# EAGLE board plc (EAGLE 8.1.0)
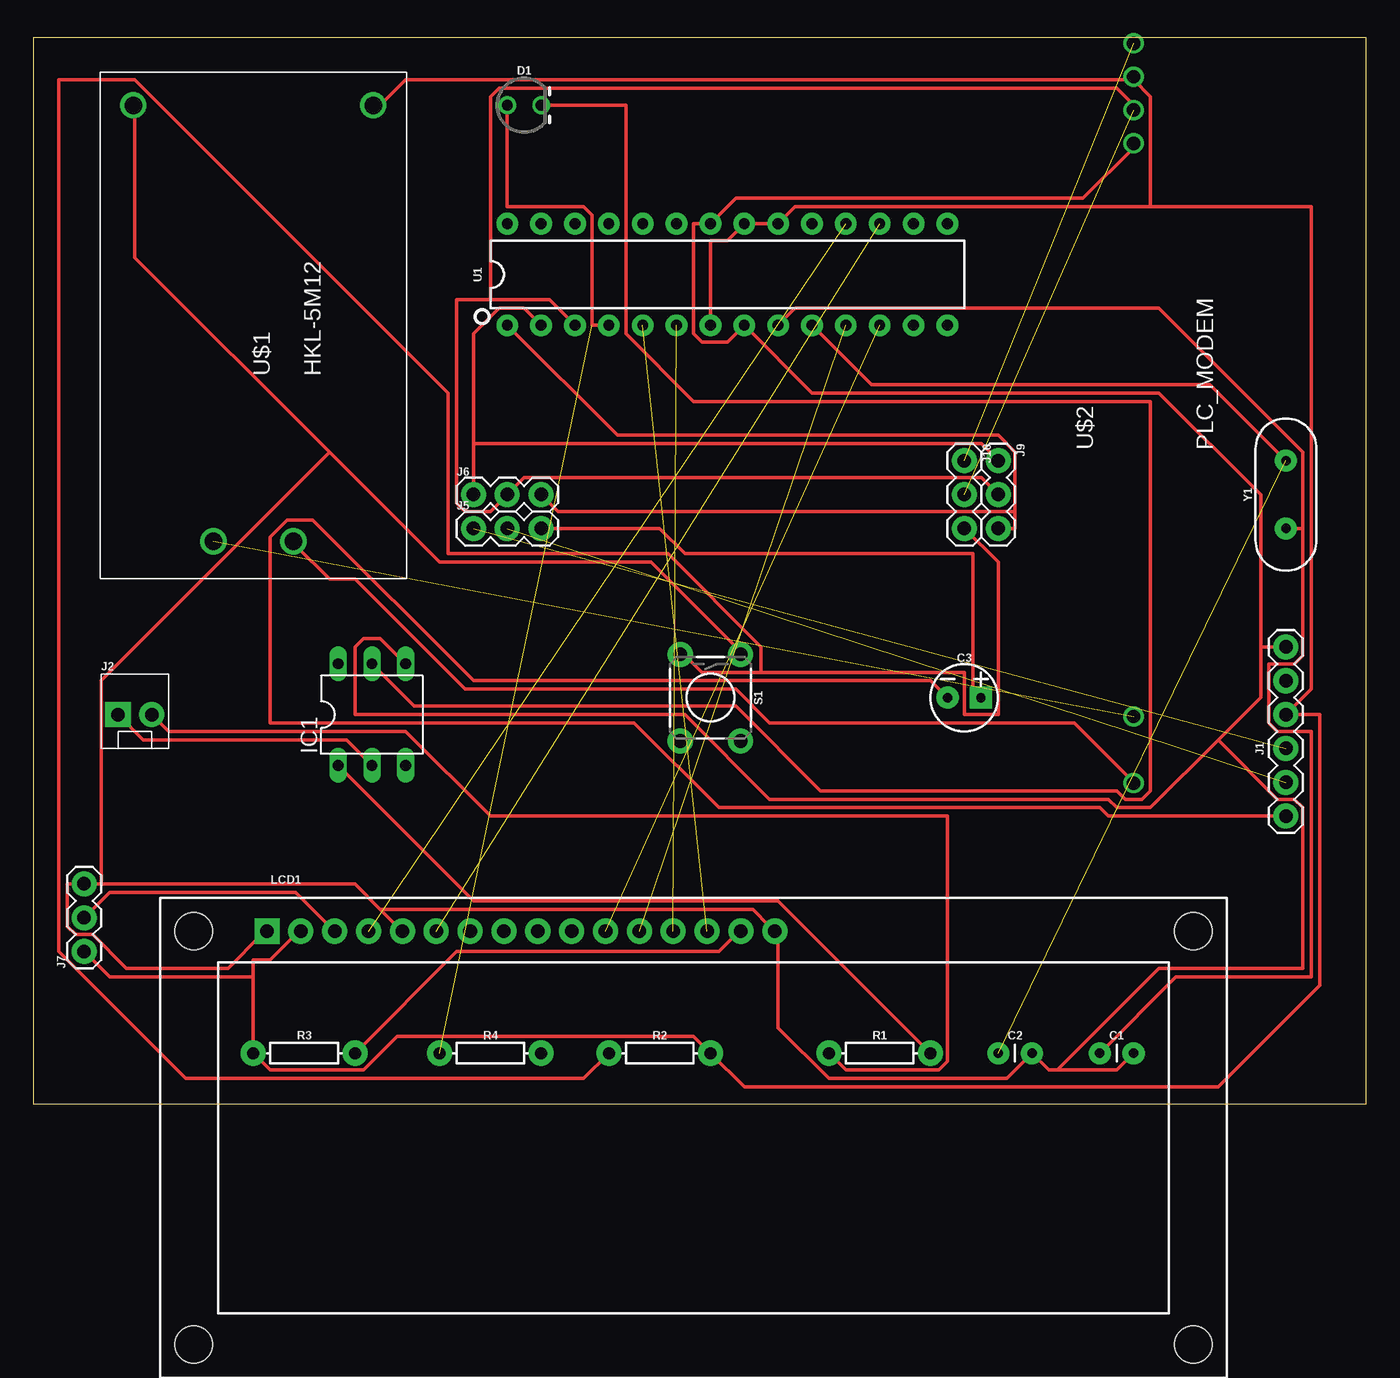
[diagram p0: board, top side]

Size 100 x 80 mm. Coordinates in mm from the lower left corner, seen from the top.
Outline: 0,0 100,0 100,80 0,80 0,0
Copper layers (1*16): Top 0.035mm / dielectric 1.5mm / Bottom 0.035mm
Design rules "default": minimum track width 10mil, minimum drill 24mil, track to track 8mil, track to pad 8mil, pad to pad 8mil, via to via 8mil, smd to smd 8mil, copper to edge 40mil, drill to drill 8mil, minimum pad ring 10mil, minimum via ring 8mil, stop-mask expansion 4mil, vias tented up to drill 0mil, thermal gap 10mil

## Footprints (pad centres in the part's own frame; a part is rotated, then mirrored left to right if it is on the bottom)
CAP-PTH-2.54 = drill 0.7 pad 1.651: 1 -1.27,0; 2 1.27,0
CPOL-RADIAL-2.5MM-5MM = drill 0.7 pad 1.651 square: 1 1.25,0 | drill 0.7 pad 1.651: 2 -1.25,0
LED_3MM-NS = drill 0.813: A -1.27,0; K 1.27,0
DIL06 = drill 0.813 long: 1 -2.54,-3.81; 2 0,-3.81; 3 2.54,-3.81; 4 2.54,3.81; 5 0,3.81; 6 -2.54,3.81
FTDI_BASIC = drill 1.016 pad 1.88: CTS 10.16,0; DTR 0,0; GND 12.7,0; RXI 2.54,0; TXO 5.08,0; VCC 7.62,0
MOLEX-1X2 = drill 1.016 pad 1.88 square: 1 0,0 | drill 1.016 pad 1.88: 2 2.54,0
1X03 = drill 1.016 pad 1.88: 1 0,0; 2 2.54,0; 3 5.08,0
LCD-16X2 = drill 1.016 pad 1.88 square: 1 -32,15.5 | drill 1.016 pad 1.88: 2 -29.46,15.5; 3 -26.92,15.5; 4 -24.38,15.5; 5 -21.84,15.5; 6 -19.3,15.5; 7 -16.76,15.5; 8 -14.22,15.5; 9 -11.68,15.5; 10 -9.14,15.5; 11 -6.6,15.5; 12 -4.06,15.5; 13 -1.52,15.5; 14 1.02,15.5; 15 3.56,15.5; 16 6.1,15.5 | hole 2.8: -37.5,15.5; -37.5,-15.5; 37.5,15.5; 37.5,-15.5
AXIAL-0.3 = drill 0.9 pad 1.88: P$1 -3.81,0; P$2 3.81,0
TACTILE_SWITCH_PTH_6.0MM = drill 1.016 pad 1.88: 1 -3.251,2.261; 2 3.251,2.261; 3 -3.251,-2.261; 4 3.251,-2.261
DIP28 = drill 0.813 pad 1.626: 1 -16.51,-3.81; 2 -13.97,-3.81; 3 -11.43,-3.81; 4 -8.89,-3.81; 5 -6.35,-3.81; 6 -3.81,-3.81; 7 -1.27,-3.81; 8 1.27,-3.81; 9 3.81,-3.81; 10 6.35,-3.81; 11 8.89,-3.81; 12 11.43,-3.81; 13 13.97,-3.81; 14 16.51,-3.81; 15 16.51,3.81; 16 13.97,3.81; 17 11.43,3.81; 18 8.89,3.81; 19 6.35,3.81; 20 3.81,3.81; 21 1.27,3.81; 22 -1.27,3.81; 23 -3.81,3.81; 24 -6.35,3.81; 25 -8.89,3.81; 26 -11.43,3.81; 27 -13.97,3.81; 28 -16.51,3.81
HLK-5M12 = drill 1.3 pad 2: 1 -16.2,3; 2 -16.2,-3 | drill 1.3 pad 1.676: 3 16.5,9; 4 16.5,-9
PLC_SUNROM = drill 1 pad 1.422: 5V 25,0; GND 20,0; LIVE -28,0; NEUTRAL -23,0; RX 22.5,0; TX 27.5,0
HC49US = drill 0.7 pad 1.651: 1 -2.54,0; 2 2.54,0

## Placement (x,y rotation side)
C1  22pF  [CAP-PTH-2.54]  81.28,3.81 0 top
C2  22pF  [CAP-PTH-2.54]  73.66,3.81 0 top
C3  10uF  [CPOL-RADIAL-2.5MM-5MM]  69.85,30.48 0 top
D1  [LED_3MM-NS]  36.83,74.93 0 top
FRAME1  FRAME-LETTERNO_PACKAGE  [DUMMY]  -63.5,60.96 0 top  (outside the outline)
IC1  [DIL06]  25.4,29.21 0 top
J1  6_PIN_SERIAL_CABLEPTH  [FTDI_BASIC]  93.98,21.59 90 top
J2  [MOLEX-1X2]  6.35,29.21 0 top
J5  [1X03]  33.02,43.18 0 top
J6  [1X03]  33.02,45.72 0 top
J7  [1X03]  3.81,11.43 90 top
J9  [1X03]  72.39,48.26 270 top
J10  [1X03]  69.85,48.26 270 top
LCD1  LCD-16X2SILK  [LCD-16X2]  49.53,-2.54 0 top
R1  1k  [AXIAL-0.3]  63.5,3.81 0 top
R2  10k  [AXIAL-0.3]  46.99,3.81 0 top
R3  220ohm  [AXIAL-0.3]  20.32,3.81 0 top
R4  39k  [AXIAL-0.3]  34.29,3.81 0 top
S1  MOMENTARY-SWITCH-SPST-PTH-6.0MM  [TACTILE_SWITCH_PTH_6.0MM]  50.8,30.48 270 top
U1  328P  [DIP28]  52.07,62.23 0 top
U$1  HKL-5M12  [HLK-5M12]  16.51,58.42 90 top
U$2  PLC_MODEM  [PLC_SUNROM]  82.55,52.07 90 top
Y1  16MHz  [HC49US]  93.98,45.72 90 top

## Library data of the parts
C1 C2 = SparkFun-Capacitors; PROD_ID: CAP-09128
C3 = SparkFun-Capacitors; PROD_ID: CAP-08440
D1 = SparkFun-LED
FRAME1 = SparkFun-Aesthetics; DESIGNER: Nobody; VERSION: v01
IC1 = ic-package
J1 J5-J7 J9 J10 = SparkFun-Connectors
J2 = SparkFun-Connectors; SF_ID: PRT-09918
LCD1 = SparkFun-Displays; SF_ID: LCD-00255
R1 R3 = SparkFun-Resistors; PROD_ID: RES-08380
R2 = SparkFun-Resistors; PROD_ID: RES-12183
R4 = SparkFun-Resistors; PROD_ID: RES-12182
S1 = SparkFun-Switches; PROD_ID: SWCH-08441; SF_SKU: COM-00097
U1 = SparkFun-IC-Microcontroller; PROD_ID: IC-09136
U$1 = hilink
U$2 = plc_modem
Y1 = SparkFun-Clocks; PROD_ID: XTAL-08181; SF_ID: COM-00536

## Nets
9: C1.1 U1.9 Y1.1
10: C2.1 U1.10 Y1.2
12V: R4.P$2
A: J1.TXO J5.1
B: J1.RXI J5.2
C: J10.1 U$2.TX
D: J10.2 U$2.RX
D2: D1.A R4.P$1 U1.4
DB4: LCD1.11 U1.12
DB5: LCD1.12 U1.11
DB6: LCD1.13 U1.6
DB7: LCD1.14 U1.5
E: LCD1.6 U1.17
F: J10.3 R2.P$1 S1.3
GND: C1.2 C2.2 IC1.4 J1.GND J7.3 LCD1.1 LCD1.5 LCD1.16 S1.1 U1.8 U1.22 U$1.3 U$2.GND
LED+: LCD1.15 R3.P$2
LIVE: U$1.2 U$2.LIVE
N$1: C3.2 J1.DTR
N$3: IC1.1 R1.P$2
N$4: C3.1 J5.3
N$8: D1.K IC1.5
N$10: J2.2 R1.P$1
NEUTRAL: U$1.1 U$2.NEUTRAL
RESET: J6.3 J9.3 U1.1
RS: LCD1.4 U1.18
RX: J6.1 J9.1 U1.2
TX: J6.2 J9.2 U1.3
VCC: J1.VCC J7.1 LCD1.2 R2.P$2 R3.P$1 U1.7 U1.20 U1.21 U$1.4 U$2.5V
VO: J7.2 LCD1.3
X: IC1.2 J2.1

## Tracks (layer width: path | path; a pad name or v marks a point on that pad's centre or on a via)
9
  Top 0.254: U1.9 57.15,59.69 84.45,59.69 95.25,48.9 95.25,43.18 | Y1.1 95.25,43.18 | C1.1 85.72,9.53 95.89,9.53 95.89,27.94 93.34,27.94 92.71,28.57 92.71,33.02 94.61,33.02 95.25,33.66 95.25,43.18
10  (1 unrouted)
  Top 0.254: U1.10 62.87,53.98 88.27,53.98 Y1.2
A  (1 unrouted)
B  (1 unrouted)
C  (1 unrouted)
D  (1 unrouted)
D2  (1 unrouted)
  Top 0.254: D1.A 35.56,67.31 41.27,67.31 41.91,66.67 41.91,58.42 U1.4
DB4  (1 unrouted)
DB5  (1 unrouted)
DB6  (1 unrouted)
DB7  (1 unrouted)
E  (1 unrouted)
F
  Top 0.254: R2.P$1 41.27,1.91 11.43,1.91 1.91,11.43 1.91,76.83 7.62,76.83 31.11,53.34 31.11,41.27 47.62,41.27 54.61,34.29 54.61,32.38 | 54.61,32.38 50.16,32.38 48.9,33.66 S1.3 | J10.3 72.39,40.64 72.39,29.21 69.85,29.21 69.85,32.38 54.61,32.38
GND
  Top 0.254: U$2.GND 82.55,71.75 78.74,67.94 52.7,67.94 U1.22 49.53,66.04 49.53,57.78 50.16,57.15 52.07,57.15 U1.8 58.42,53.34 84.45,53.34 92.08,45.72 92.08,34.29 | IC1.4 26.04,34.92 24.77,34.92 24.13,34.29 24.13,29.21 48.9,29.21 55.24,22.86 80.64,22.86 81.28,22.23 83.82,22.23 88.9,27.3 | 88.9,27.3 92.08,30.48 92.08,34.29 | J1.GND 92.08,34.29 | 22.23,48.9 7.62,63.5 7.62,74.3 U$1.3 | 22.23,48.9 30.48,40.64 46.35,40.64 52.7,34.29 S1.1 | 76.83,2.54 81.28,2.54 C1.2 | 76.83,2.54 76.2,2.54 C2.2 73.03,1.91 59.69,1.91 55.88,5.71 55.88,12.7 LCD1.16 55.24,13.34 53.98,14.61 26.04,14.61 | LCD1.1 17.14,12.7 14.61,10.16 6.99,10.16 4.45,12.7 3.17,12.7 2.54,13.34 2.54,16.51 J7.3 5.08,16.51 | 26.04,14.61 24.13,16.51 5.08,16.51 | 26.04,14.61 27.3,13.34 LCD1.5 | 22.23,48.9 5.08,31.75 5.08,16.51 | 88.9,27.3 93.34,22.86 94.61,22.86 95.25,22.23 95.25,10.16 84.45,10.16 76.83,2.54
LED+
  Top 0.254: R3.P$2 31.75,11.43 51.44,11.43 52.7,12.7 LCD1.15
LIVE
  Top 0.254: U$2.LIVE 82.55,24.13 78.11,28.57 55.24,28.57 52.7,31.11 32.38,31.11 24.13,39.37 22.23,39.37 19.68,41.91 U$1.2
N$1
  Top 0.254: J1.DTR 80.64,21.59 80.01,22.23 51.44,22.23 45.09,28.57 17.78,28.57 17.78,42.55 19.05,43.81 20.95,43.81 33.02,31.75 67.31,31.75 68.58,30.48 C3.2
N$3
  Top 0.254: IC1.1 33.02,15.24 55.88,15.24 R1.P$2
N$4
  Top 0.254: J5.3 46.99,43.18 48.9,41.27 70.48,41.27 70.48,30.48 C3.1
N$8
  Top 0.254: IC1.5 28.57,29.84 52.7,29.84 59.05,23.5 81.28,23.5 81.92,22.86 83.19,22.86 83.82,23.5 83.82,52.7 49.53,52.7 44.45,57.78 44.45,74.93 D1.K
N$10
  Top 0.254: R1.P$1 60.96,2.54 67.94,2.54 68.58,3.17 68.58,21.59 34.29,21.59 27.94,27.94 10.16,27.94 J2.2
NEUTRAL  (1 unrouted)
RESET
  Top 0.254: U1.1 43.81,50.16 72.39,50.16 73.66,48.9 73.66,44.45 | 73.66,44.45 73.66,43.18 J9.3 | J6.3 39.37,44.45 73.66,44.45
RS  (1 unrouted)
RX
  Top 0.254: U1.2 36.83,59.69 34.92,59.69 33.02,57.78 33.02,49.53 | J6.1 33.02,49.53 | J9.1 71.12,49.53 33.02,49.53
TX
  Top 0.254: 82.55,74.93 81.28,76.2 34.92,76.2 34.29,75.56 34.29,60.33 | 34.29,60.33 38.73,60.33 U1.3 | 34.29,60.33 31.75,60.33 31.75,45.09 32.38,44.45 34.29,44.45 J6.2 36.83,46.99 71.12,46.99 J9.2
VCC
  Top 0.254: 16.51,9.53 16.51,10.79 17.78,10.79 19.68,12.7 LCD1.2 | 16.51,9.53 R3.P$1 17.78,2.54 24.77,2.54 27.3,5.08 49.53,5.08 R2.P$2 53.34,1.27 88.9,1.27 96.52,8.89 96.52,29.21 J1.VCC 95.89,31.11 95.89,67.31 83.82,67.31 | J7.1 5.71,9.53 16.51,9.53 | U1.7 50.8,64.77 52.07,64.77 U1.21 U1.20 57.15,67.31 83.82,67.31 | 82.55,76.83 83.82,75.56 83.82,67.31 | 82.55,76.83 27.94,76.83 26.04,74.93 U$1.4 | 82.55,76.83 U$2.5V
VO
  Top 0.254: J7.2 5.71,15.88 19.68,15.88 22.23,13.34 LCD1.3
X
  Top 0.254: IC1.2 23.5,27.3 8.26,27.3 J2.1